# Altium PCB UmbilicalBoardV3.PcbDoc
Units mm, origin at the board's own origin, x right, y up, seen from the top; angles counter-clockwise.
Board outline 89.1 x 92.94 mm, 4 copper layers (Top Layer, GndPlane, PowerPlane, Bottom Layer), stack 0.107 mm thick; 48 components, 68 nets, 393 pads, 78 vias.
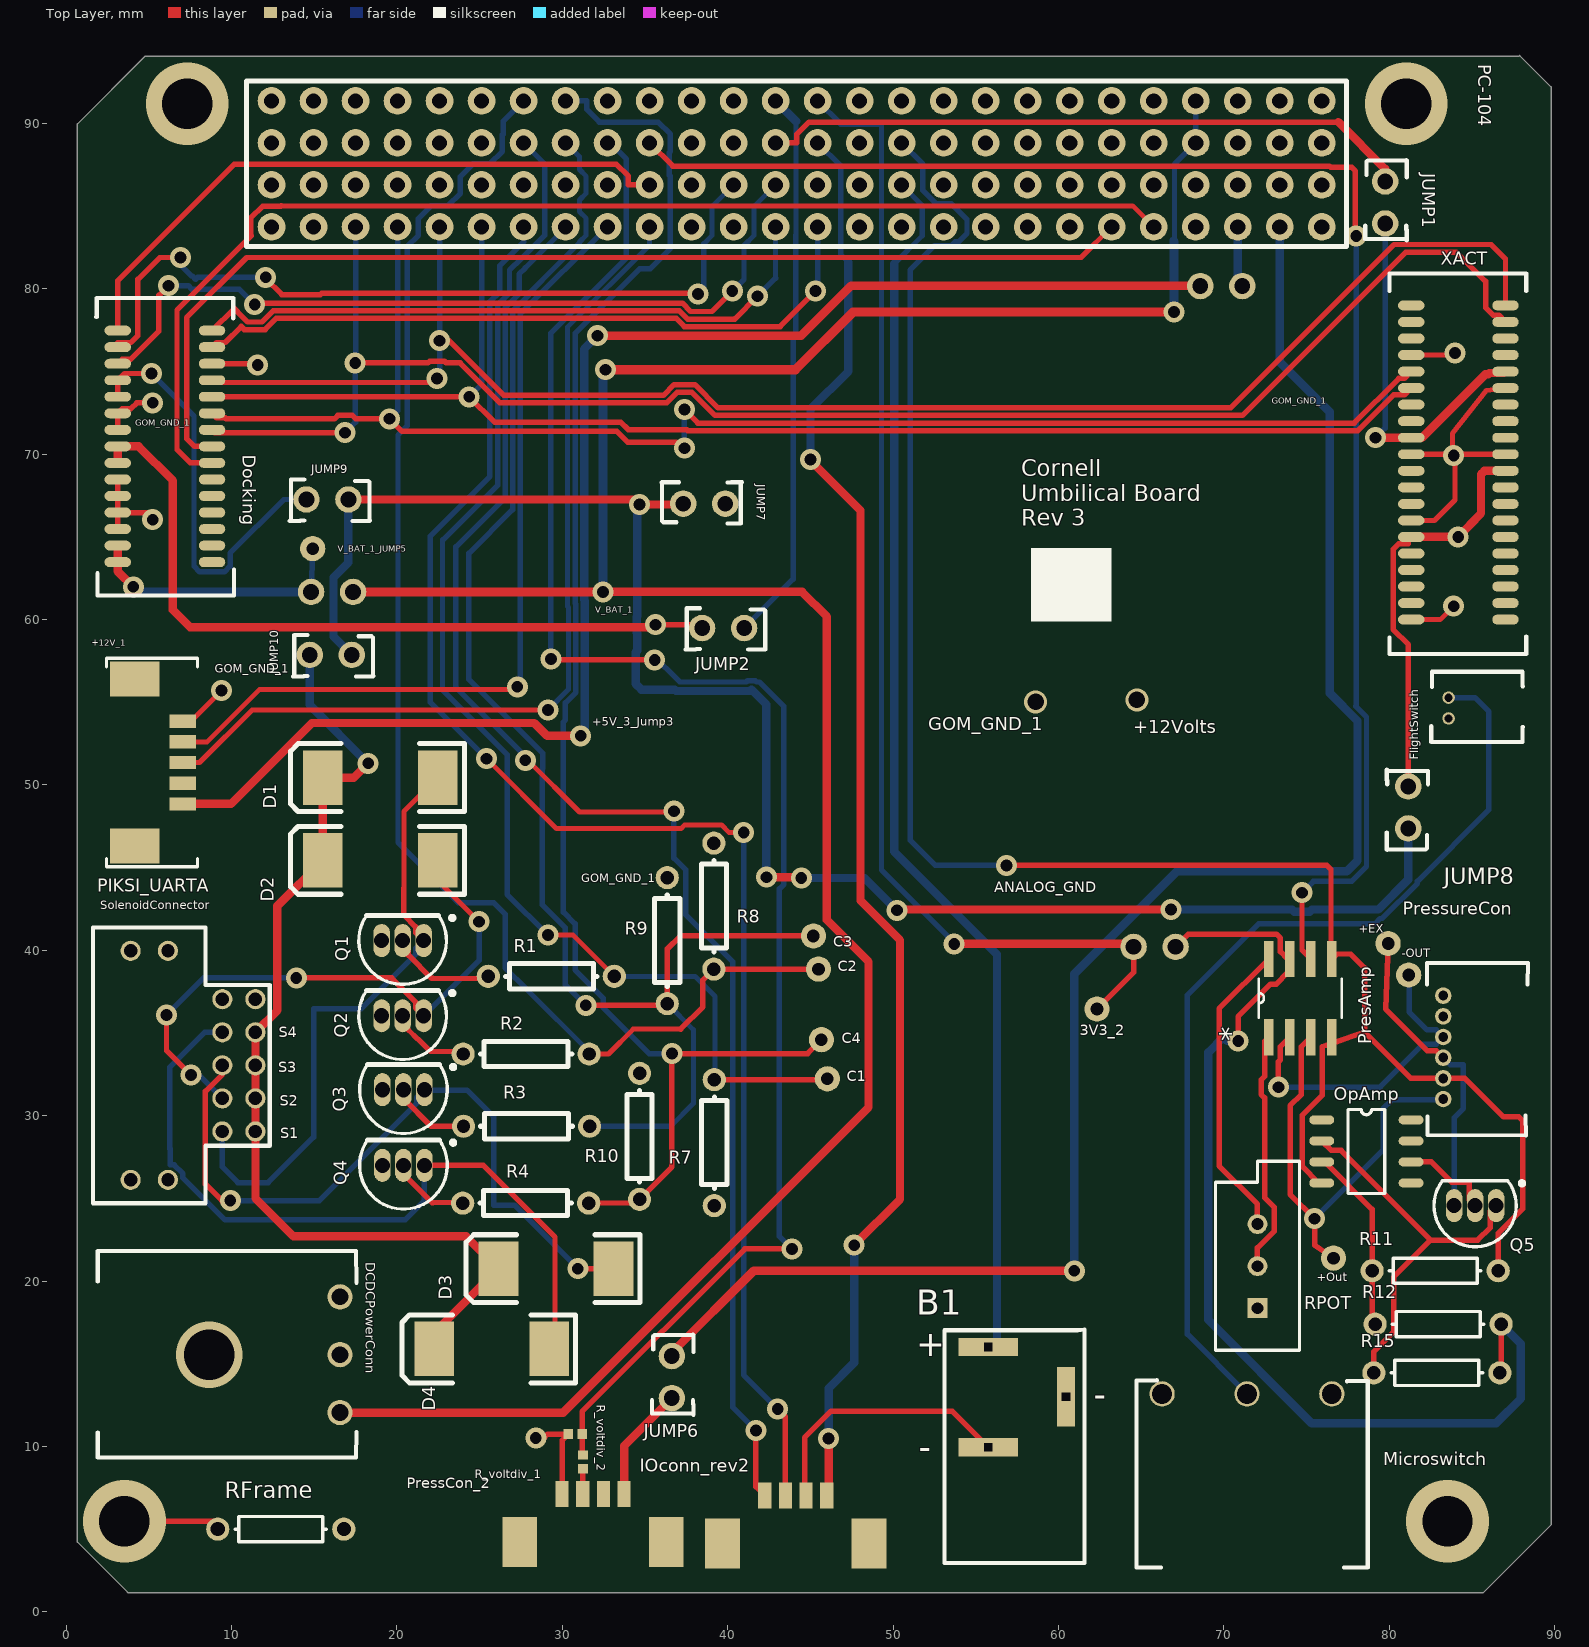
[diagram p0: Top Layer view]
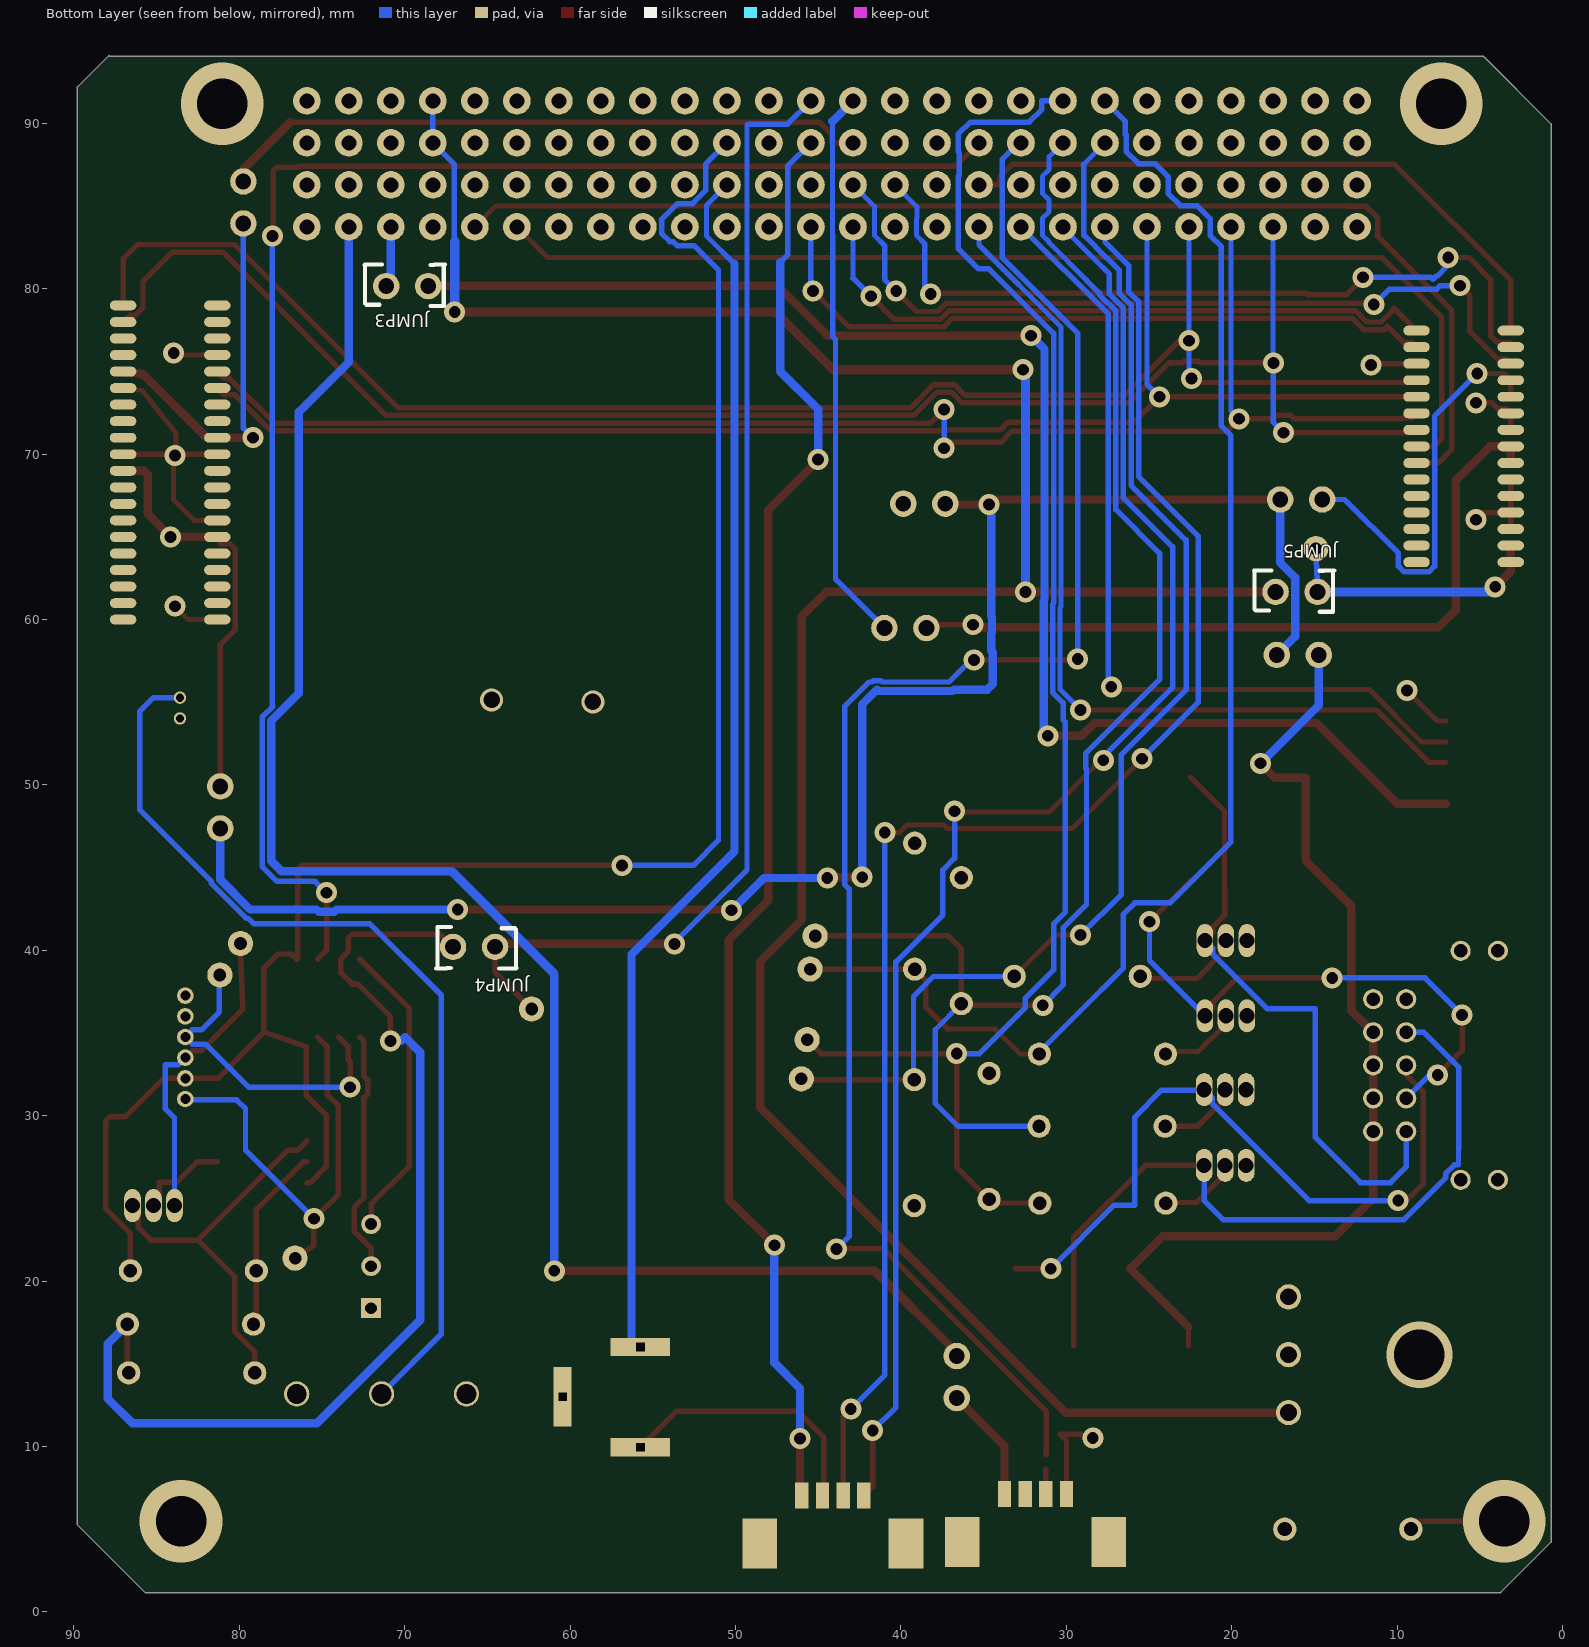
[diagram p1: Bottom Layer view, seen from below]
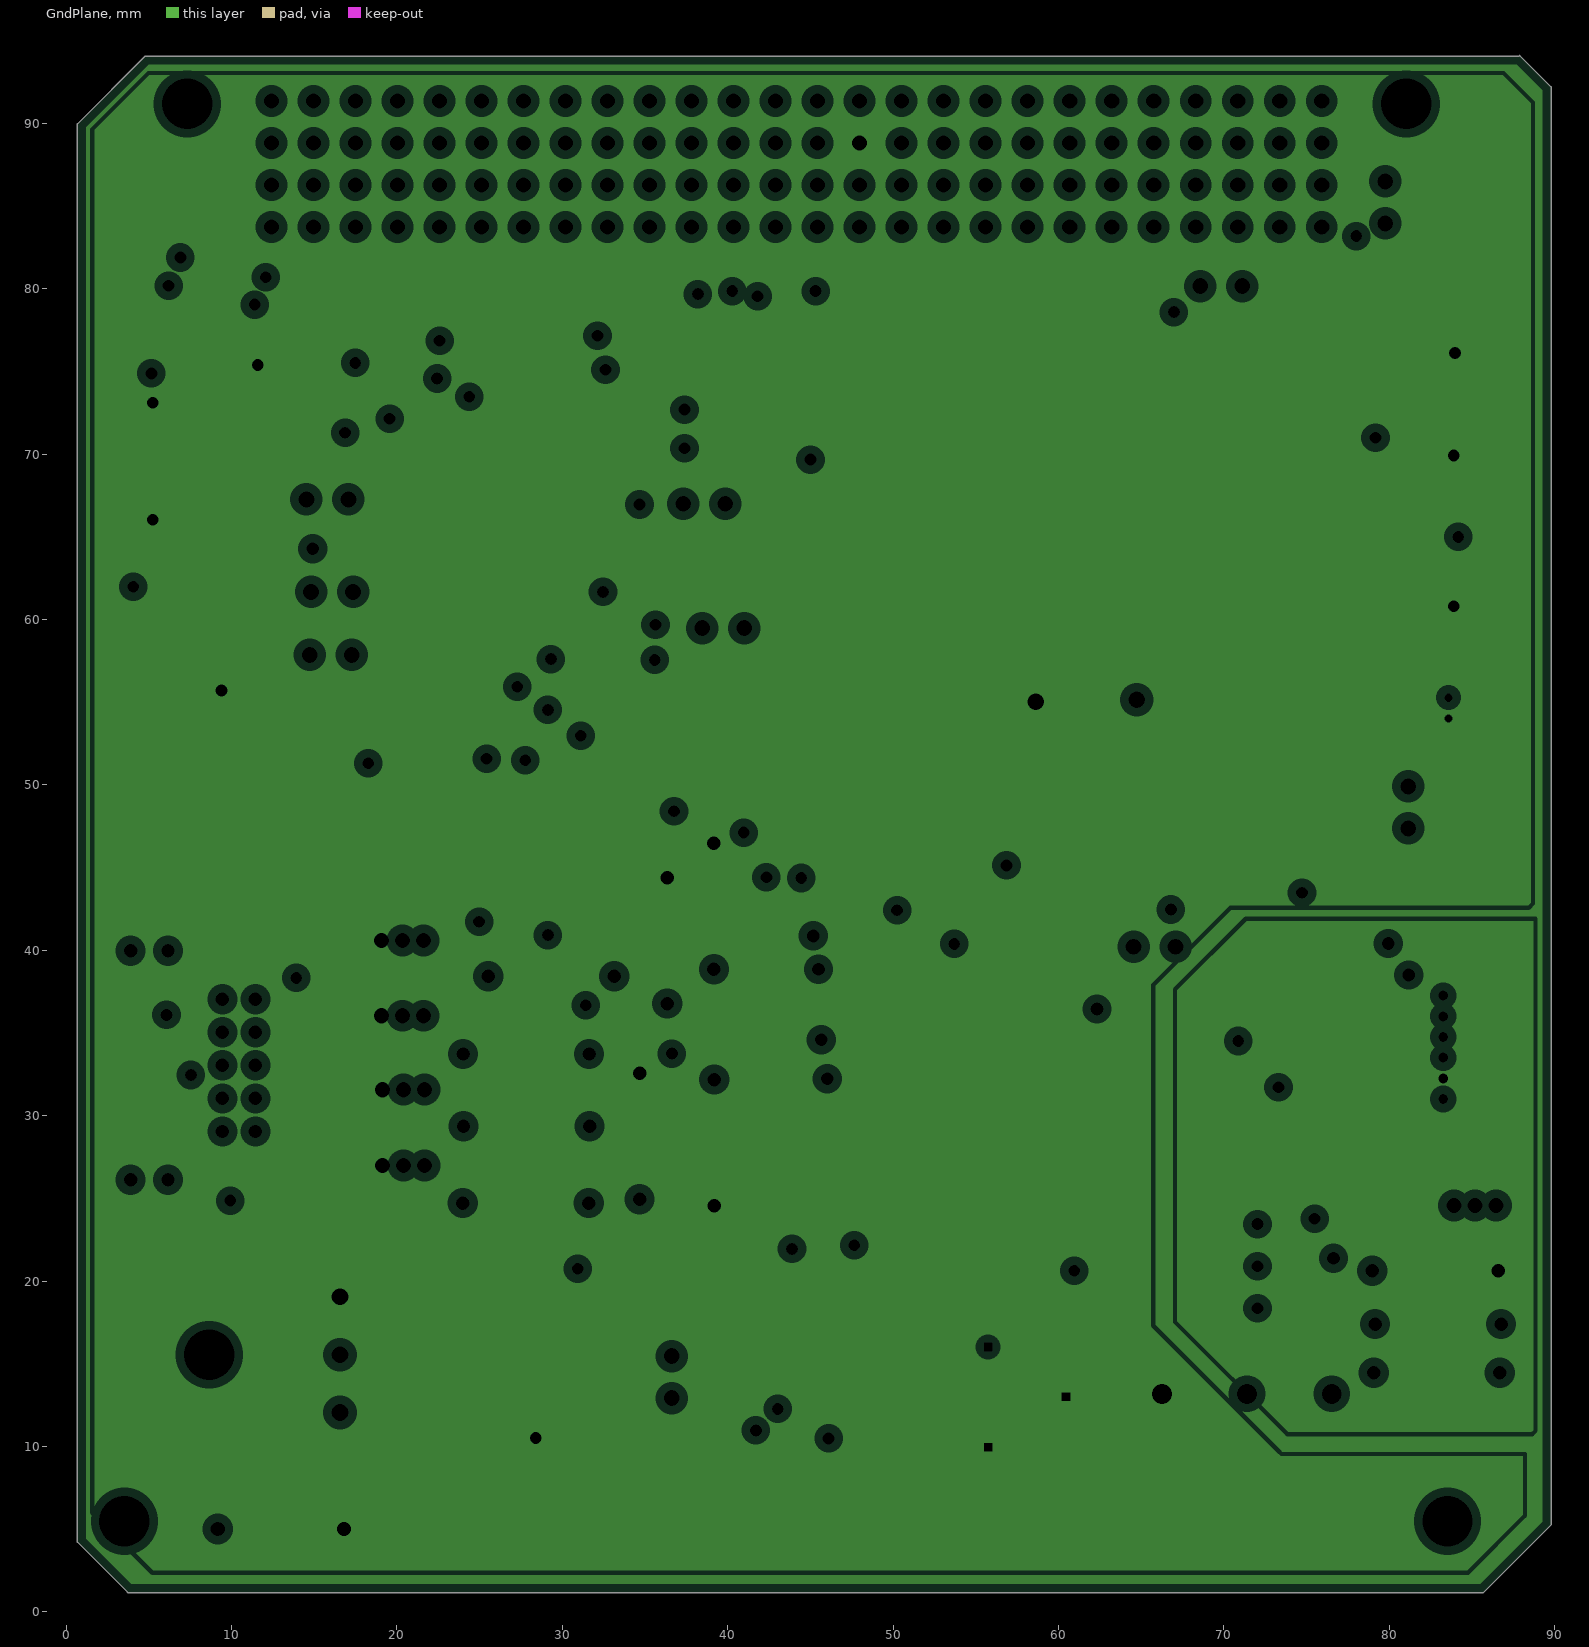
[diagram p2: GndPlane, clearances drawn from the general rule]
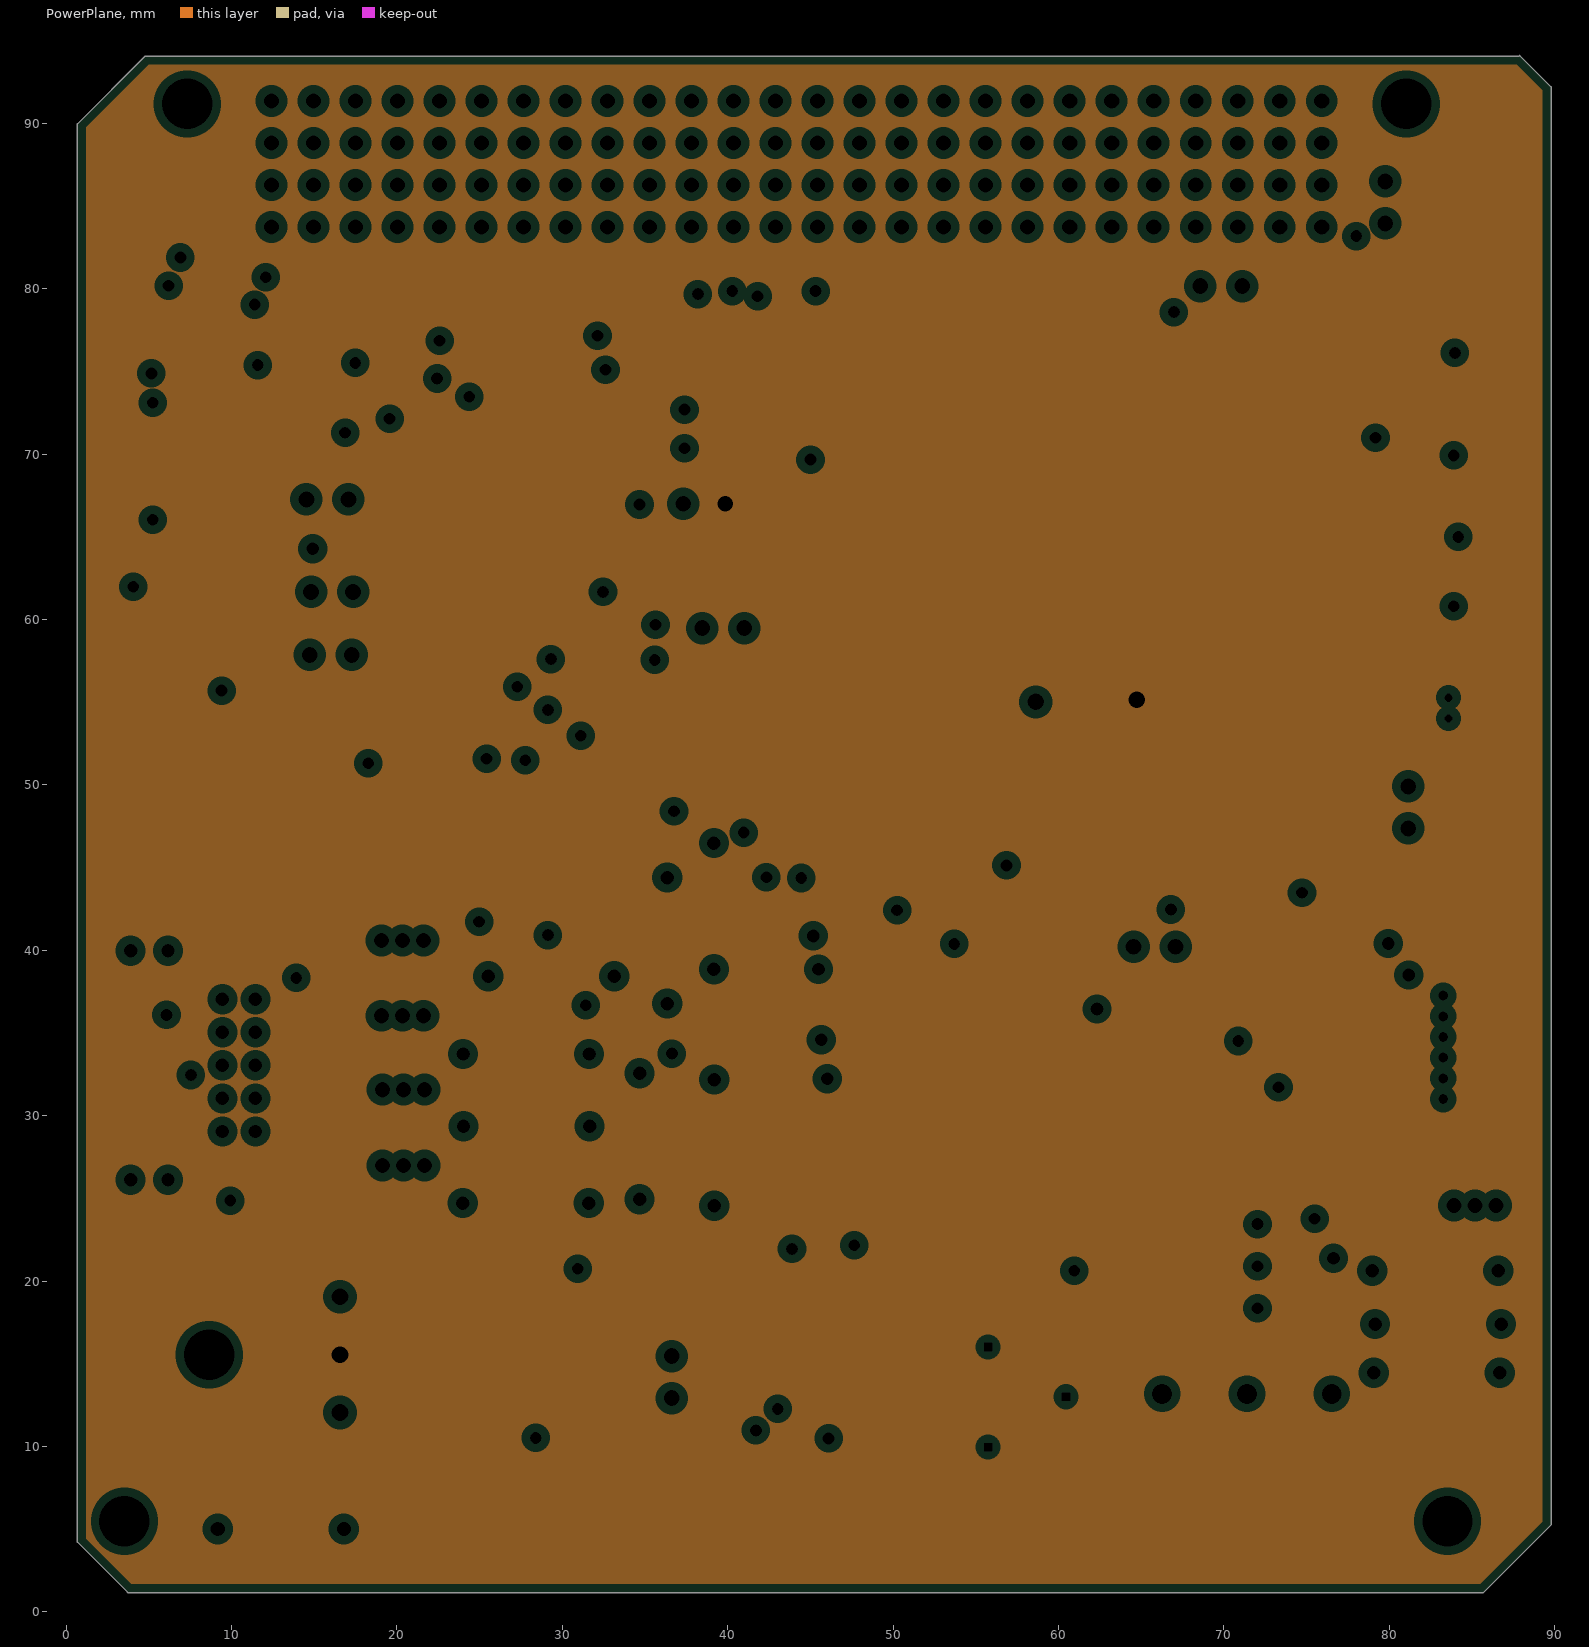
[diagram p3: PowerPlane, clearances drawn from the general rule]

## Layer stack, top to bottom
Top Solder: solder mask 0.0102, Solder Resist, Dk 3.5
Top Layer: signal copper 0.0356
GndPlane: plane copper 0.0178
PowerPlane: plane copper 0.0178, net +12V_1_JUMP7
Bottom Layer: signal copper 0.0356
Bottom Solder: solder mask 0.0102, Solder Resist, Dk 3.5

## Board outline
4.775,94.056 0.686,89.967 0.686,4.216 3.708,1.194 3.734,1.168 84.506,1.168 85.7,1.168 89.789,5.258 89.789,91.821 89.789,92.202 87.884,94.107 87.833,94.056 4.801,94.056

## Design rules (kind name [scope] priority, off if disabled: settings)
Clearance [All] p1: gap=0.254 except(0.127: Track-Track Track-SMDPad Track-THPad SMDPad-SMDPad SMDPad-THPad THPad-THPad)
HoleSize [All] p1: absolutevalues=TRUE maxlimit=3.048 minlimit=0.025 maxpercent=80.000 minpercent=20.000
MinimumSolderMaskSliver [All] p1: minsoldermaskwidth=0.127
PlaneClearance [All] p1: clearance=0.508
PlaneConnect [All] p1: planeconnectstyle=Direct reliefexpansion=0.508 reliefentries=4 reliefconductorwidth=0.254 reliefairgap=0.254
PolygonConnect [All] p1: connectstyle=Direct reliefconductorwidth=0.254 reliefentries=4 polygonreliefangle="90 Angle" airgapwidth=0.254
RoomDefinition PressureSensor [InComponentClass('PressureSensor')] p1: confinementstyle=ConfineIn formatcopy=TRUE lockcomponents=FALSE outline 89.052,42.266 88.603,41.829 69.001,41.829 69.001,13.746 68.631,13.386 88.947,13.386
RoomDefinition SolSwitch [InComponentClass('SolSwitch')] p2: confinementstyle=ConfineIn formatcopy=TRUE lockcomponents=FALSE outline 1.372,23.825 1.372,42.24 1.803,42.672 11.278,42.672 11.278,51.333 13.945,54 14.376,53.569 25.298,53.569 31.852,47.015 32.766,47.93 41.935,47.93 41.935,24.587 30.556,13.208 20.041,13.208 20.041,20.65 17.12,23.571 1.854,23.571
RoutingVias [All] p1: holewidth=0.711 width=1.27 viastyle="Through Hole" minholewidth=0.711 minwidth=1.27 maxholewidth=0.711 maxwidth=1.27
SolderMaskExpansion [All] p1: expansion=0.102
Width [All] p1: maxlimit=0.559 minlimit=0.305 preferedwidth=0.33
26 further rules are at their usual default settings.

## Classes and differential pairs
component class PressureSensor: OpAmp PresAmp PressureCon Q5 R11 R12 R15 RPOT
component class PIKSI_UARTA: PIKSI_UARTA
component class XACT: XACT
component class U_IOconnector: IOconn_rev2
component class Docking: Docking
component class Switch: FlightSwitch Microswitch
component class Umbilical104: PC-104
component class SolSwitch: D1 D2 D3 D4 Q1 Q2 Q3 Q4 R1 R2 R3 R4 R7 R8 R9 R10
component class U_Jumpers_rev2: JUMP1 JUMP2 JUMP3 JUMP4 JUMP5 JUMP6 JUMP7 JUMP8 JUMP9 JUMP10
component class U_PressureConnector_2: PressCon_2 R_Voltdiv_1 R_Voltdiv_2
component class "Barrel Jack": B1
component class DCDCPowerConn: DCDCPowerConn
component class U_GroundtoFrame: RFrame

## Components (designator, comment, footprint, x,y, rotation, side; value= is the part's Value field where it differs from the comment)
B1 "Barrel_Jack" BARREL_JACK 55.753,9.957 r0 top
D1 "Diode" SMC 18.999,50.444 r180 top
D2 "Diode" SMC 18.999,45.441 r180 top
D3 "Diode" SMC 29.616,20.752 r180 top
D4 "Diode" SMC 25.73,15.9 r180 top
DCDCPowerConn "DCDCPowerConn" DCDCPOWERCONN 16.561,19.05 r270 top
Docking "Docking_Molex_30Pin" DOCKING_MOLEX_30PIN 3.124,77.47 r270 top
FlightSwitch "RemoverBeforeFlightSwitch" "REMOVERBEFOREFLIGHT SWITCH" 83.591,52.07 r90 top
IOconn_rev2 "IOconn_rev2" IOCONN_REV2 42.24,7.036 r0 top
JUMP1 "Jumper(DIP2)" JUMPER(DIP2) 79.756,86.487 r270 top
JUMP2 "Jumper(DIP2)" JUMPER(DIP2) 40.996,59.487 r180 top
JUMP3 "Jumper(DIP2)" JUMPER(DIP2) 71.12,80.162 r180 bottom
JUMP4 "Jumper(DIP2)" JUMPER(DIP2) 64.541,40.208 r0 bottom
JUMP5 "Jumper(DIP2)" JUMPER(DIP2) 17.348,61.671 r180 bottom
JUMP6 "Jumper(DIP2)" JUMPER(DIP2) 36.627,15.469 r270 top
JUMP7 "Jumper(DIP2)" JUMPER(DIP2) 37.313,67.005 r0 top
JUMP8 "Jumper(DIP2)" JUMPER(DIP2) 81.153,47.371 r90 top
JUMP9 "Jumper(DIP2)" JUMPER(DIP2) 17.069,67.259 r180 top
JUMP10 "Jumper(DIP2)" JUMPER(DIP2) 17.272,57.861 r180 top
Microswitch "MicroSwitch" MICROSWITCH_3PIN 71.45,13.233 r180 top locked
OpAmp "UA741" UA741 75.921,29.743 r0 top
PC-104 "PC-104" PC-104FOOTPRINT 12.421,83.744 r0 top locked
PIKSI_UARTA "PIKSI_UART Connector" "MOLEX PICOBLADE 5 PIN" 2.642,57.455 r270 top
PresAmp "AD627ARZ" R_8 74.625,37.109 r90 top
PressCon_2 "PressureConn_2" PRESSCON_2 29.312,6.477 r0 top
PressureCon "PressureConnector" "PRESSURE CONNECTOR" 82.067,33.884 r90 top
Q1 "MOSFET" TO-226-AA 20.345,40.589 r90 top
Q2 "MOSFET" TO-226-AA 20.345,36.043 r90 top
Q3 "MOSFET" TO-226-AA 20.396,31.572 r90 top
Q4 "MOSFET" TO-226-AA 20.396,27 r90 top
Q5 "2N3906" TO-92A 85.192,24.562 r90 top
R1 "100" AXIAL-0.3#1 29.337,38.43 r180 top
R2 "100" AXIAL-0.3#1 27.813,33.731 r180 top
R3 "100" AXIAL-0.3#1 27.838,29.362 r180 top
R4 "100" AXIAL-0.3#1 27.788,24.714 r180 top
R7 "10k" AXIAL-0.3#1 39.192,28.372 r90 top
R8 "10k" AXIAL-0.3#1 39.167,42.672 r270 top
R9 "10k" AXIAL-0.3#1 36.347,40.589 r270 top
R10 "10k" AXIAL-0.3#1 34.671,28.753 r270 top
R11 "1000" AXIAL-0.3#1 82.779,20.625 r0 top
R12 "1000" AXIAL-0.3#1 82.956,17.399 r180 top
R15 "1000" AXIAL-0.3#1 82.88,14.453 r180 top
R_voltdiv_1 "3K" 0402 30.785,10.744 r0 top
R_voltdiv_2 "1090" 0402 31.242,9.068 r90 top
RFrame "Rframe" AXIAL-0.3#2 12.979,5.004 r180 top
RPOT "100K" VR5 72.034,20.904 r90 top
SolenoidConnector "T2M-105-01-X-D-RA-WT" T2M-105-01-X-D-RA-WT 9.449,33.045 r90 top
XACT "XACT_Molex_40Pin" XACT_MOLEX_40PIN 81.331,78.994 r270 top

## Footprints (in the part's own frame and the unit in brackets; to place one, negate y for a bottom-side part, rotate by r counter-clockwise, add the part's x,y. Pads: shape width x height; smd on the part's side, far side on the other; paste and mask are expansions set on the pad)
0402 [mil]
  rect 22x24 smd: 1(-16.5,0) 2(16.5,0)
AXIAL-0.3#1 [mm] "Axial Device, Thru-Hole; 2 Leads; 0.3 in Pin Spacing"
  round 1.4 hole 0.813: 1(-3.81,0) 2(3.81,0)
  silkscreen extent -2.77,-0.76 2.77,0.76
AXIAL-0.3#2 [mm] "Axial Device, Thru-Hole; 2 Leads; 0.3 in Pin Spacing"
  round 1.4 hole 0.85: 1(-3.81,0) 2(3.81,0)
  silkscreen extent -2.77,-0.76 2.77,0.76
BARREL_JACK [mm] "KLDX-0202-B"
  rect 3.6x1.1 hole 0.5 square: 0(0,0) 2(0,6.05)
  rect 1.1x3.6 hole 0.5 square: 1(4.7,3.05)
  silkscreen extent -2.65,-7 5.82,7.12
DCDCPOWERCONN [mil] "172310-1103"
  round 60 hole 40.16: 1(0,0) 2(137.8,0) 3(275.59,0)
  silkscreen extent -109,-577 383,39, body extent -109,-577 383,38, height 239
DOCKING_MOLEX_30PIN [mm] "501571-3007"
  oval 0.6x1.6 smd: A1(0,0) A2(1,0) A3(2,0) A4(3,0) A5(4,0) A6(5,0) A7(6,0) A8(7,0) A9(8,0) A10(9,0) A11(10,0) A12(11,0) A13(12,0) A14(13,0) A15(14,0) A16(0,5.7) A17(1,5.7) A18(2,5.7) A19(3,5.7) A20(4,5.7) A21(5,5.7) A22(6,5.7) A23(7,5.7) A24(8,5.7) A25(9,5.7) A26(10,5.7) A27(11,5.7) A28(12,5.7) A29(13,5.7) A30(14,5.7)
  oval 0.6x1.6 smd far side: B1(0,0) B2(1,0) B3(2,0) B4(3,0) B5(4,0) B6(5,0) B7(6,0) B8(7,0) B9(8,0) B10(9,0) B11(10,0) B12(11,0) B13(12,0) B14(13,0) B15(14,0) B16(0,5.7) B17(1,5.7) B18(2,5.7) B19(3,5.7) B20(4,5.7) B21(5,5.7) B22(6,5.7) B23(7,5.7) B24(8,5.7) B25(9,5.7) B26(10,5.7) B27(11,5.7) B28(12,5.7) B29(13,5.7) B30(14,5.7)
  silkscreen extent -1.97,-1.3 16.02,7.02, body extent -1.97,-1.27 16.02,6.98, height 2.95
IOCONN_REV2 [mm] "Molex 4 Pin Picoblade. Part # 53261-0471"
  rect 0.8x1.6 all layers, no hole: 1(0,0) 2(1.25,0) 3(2.5,0) 4(3.75,0)
  rect 2.1x3 all layers, no hole: 5(-2.55,-2.9) 6(6.3,-2.9)
  body extent -3.22,-4.47 6.93,0.73, height 1.7
JUMPER(DIP2) [mm] "S1012E-02-ND (Pin), 3M9580-ND (Jumper)"
  round 1.6 hole 0.95: 1(0,0) 2(2.54,0)
  silkscreen extent -1.3,-1.2 3.55,1.3
MICROSWITCH_3PIN [mm] "Omron Electronics Inc-EMC Div D2FS-FL-N-A1"
  round 1.524 hole 1.2: 1(-5.08,0.05) 2(0.05,0.05) 3(5.18,0.05)
  silkscreen extent -7.25,-0.77 6.73,10.55, body extent -7.25,-0.75 6.73,10.55
"MOLEX PICOBLADE 5 PIN" [mm] "Molex Picoblade Header, SMT, Right Angle  53261-0571"
  rect 0.8x1.6 smd: 0(3.6,4.4) 1(4.85,4.4) 2(6.1,4.4) 3(7.35,4.4) 4(8.6,4.4)
  rect 2.1x3 smd: 5(1.05,1.5) 6(11.15,1.5)
  silkscreen extent -0.2,-0.2 12.4,5.3, body extent 0.4,0 11.8,5.2, height 3.4
PC-104FOOTPRINT [mil]
  round 65.98 hole 36 mask+2.99: H1_1(0,0) H1_2(0,100) H1_3(100,0) H1_4(100,100) H1_5(200,0) H1_6(200,100) H1_7(300,0) H1_8(300,100) H1_9(400,0) H1_10(400,100) H1_11(500,0) H1_12(500,100) H1_13(600,0) H1_14(600,100) H1_15(700,0) H1_16(700,100) H1_17(800,0) H1_18(800,100) H1_19(900,0) H1_20(900,100) H1_21(1000,0) H1_22(1000,100) H1_23(1100,0) H1_24(1100,100) H1_25(1200,0) H1_26(1200,100) H1_27(1300,0) H1_28(1300,100) H1_29(1400,0) H1_30(1400,100) H1_31(1500,0) H1_32(1500,100) H1_33(1600,0) H1_34(1600,100) H1_35(1700,0) H1_36(1700,100) H1_37(1800,0) H1_38(1800,100) H1_39(1900,0) H1_40(1900,100) H1_41(2000,0) H1_42(2000,100) H1_43(2100,0) H1_44(2100,100) H1_45(2200,0) H1_46(2200,100) H1_47(2300,0) H1_48(2300,100) H1_49(2400,0) H1_50(2400,100) H1_51(2500,0) H1_52(2500,100) H2_1(0,200) H2_2(0,300) H2_3(100,200) H2_4(100,300) H2_5(200,200) H2_6(200,300) H2_7(300,200) H2_8(300,300) H2_9(400,200) H2_10(400,300) H2_11(500,200) H2_12(500,300) H2_13(600,200) H2_14(600,300) H2_15(700,200) H2_16(700,300) H2_17(800,200) H2_18(800,300) H2_19(900,200) H2_20(900,300) H2_21(1000,200) H2_22(1000,300) H2_23(1100,200) H2_24(1100,300) H2_25(1200,200) H2_26(1200,300) H2_27(1300,200) H2_28(1300,300) H2_29(1400,200) H2_30(1400,300) H2_31(1500,200) H2_32(1500,300) H2_33(1600,200) H2_34(1600,300) H2_35(1700,200) H2_36(1700,300) H2_37(1800,200) H2_38(1800,300) H2_39(1900,200) H2_40(1900,300) H2_41(2000,200) H2_42(2000,300) H2_43(2100,200) H2_44(2100,300) H2_45(2200,200) H2_46(2200,300) H2_47(2300,200) H2_48(2300,300) H2_49(2400,200) H2_50(2400,300) H2_51(2500,200) H2_52(2500,300)
  silkscreen extent -59,-47 2559,347
PRESSCON_2 [mm] "Molex Picoblade 4 pin (for the second pressure conn) Part # 53261-0471"
  rect 0.8x1.6 all layers, no hole: 1(0.675,0.65) 2(1.925,0.65) 3(3.175,0.65) 4(4.425,0.65)
  rect 2.1x3 all layers, no hole: 5(-1.875,-2.25) 6(6.975,-2.25)
  body extent -2.55,-3.82 7.6,1.38, height 1.7
"PRESSURE CONNECTOR" [mm] "53048-0610"
  round 1 hole 0.6 mask+0.076: 1(-2.875,-1.2) 2(-1.625,-1.2) 3(-0.375,-1.2) 4(0.875,-1.2) 5(2.125,-1.2) 6(3.375,-1.2)
  silkscreen extent -5.07,-6.32 5.35,-0.23, body extent -4.45,-6.08 4.8,-0.58, height 1.75
R_8 [mil]
  rect 86x22 smd: 1(-93,75) 2(-93,25) 3(-93,-25) 4(-93,-75) 5(93,-75) 6(93,-25) 7(93,25) 8(93,75)
  silkscreen extent -46,-98 46,98
"REMOVERBEFOREFLIGHT SWITCH" [mm] "Molex Picoblade Part Number: 53048-0210"
  round 0.75 hole 0.5: 1(1.95,0) 2(3.205,0)
  silkscreen extent 0.53,-4.5 4.78,1.05, body extent 0.53,-4.47 4.78,1.03, height 4.05
SMC [mm] "DO-214-AB/SMC; 2 C-Bend Leads; Body 7.9 x 5.9 mm, inc. leads (LxW)"
  rect 2.4x3.3 smd: 1(-3.475,0) 2(3.475,0)
  silkscreen extent -5.08,-2.05 5.42,2.06
T2M-105-01-X-D-RA-WT [mm]
  round 1.22 hole 0.813 mask+0.075: 1(-4,-2) 2(-4,0) 3(-2,-2) 4(-2,0) 5(0,-2) 6(0,0) 7(2,-2) 8(2,0) 9(4,-2) 10(4,0) W1(-6.925,5.55) W2(6.925,5.55) W3(-6.925,3.29) W4(6.925,3.29)
  silkscreen extent -8.33,-2.86 8.33,7.82, body extent -7.28,-2.17 8.4,7.39, height 7.45
TO-92A [mm] "TO, Flat Index; 3 In-Line, Axial Leads; Body Dia. 4.5mm; Leads 0.51 x 0.48 mm (max)"
  oval 2x1 hole 0.914: 1(0,-1.27) 2(0,0) 3(0,1.27)
  silkscreen extent -2.48,-2.96 1.5,2.48, body extent -2.48,-2.5 1.5,2.5, height 6.86
TO-226-AA [mm] "TO, Flat Index; 3 In-Line, Axial Leads; Body Dia. 4.8mm; Leads 0.55 x 0.51 mm (max)"
  oval 2x1 hole 0.914: 1(0,-1.27) 2(0,0) 3(0,1.27)
  silkscreen extent -2.65,-3.13 1.52,2.65, body extent -2.65,-2.66 1.52,2.66, height 5.33
UA741 [mm]
  oval 1.5x0.55 smd: 1(0,0) 2(0,-1.27) 3(0,-2.54) 4(0,-3.81) 5(5.4,-3.81) 6(5.4,-2.54) 7(5.4,-1.27) 8(5.4,0)
  silkscreen extent 1.58,-4.44 3.82,0.64
VR5 [mm] "Thru-Hole; 3 Leads"
  rect 1.2x1.2 hole 0.711: 1(-2.54,0)
  round 1.2 hole 0.711: 2(0,0) 3(2.54,0)
  silkscreen extent -5.08,-2.54 6.35,2.54
XACT_MOLEX_40PIN [mm] "501571-4007"
  oval 0.6x1.6 smd: A1(0,0) A2(1,0) A3(2,0) A4(3,0) A5(4,0) A6(5,0) A7(6,0) A8(7,0) A9(8,0) A10(9,0) A11(10,0) A12(11,0) A13(12,0) A14(13,0) A15(14,0) A16(15,0) A17(16,0) A18(17,0) A19(18,0) A20(19,0) A21(0,5.7) A22(1,5.7) A23(2,5.7) A24(3,5.7) A25(4,5.7) A26(5,5.7) A27(6,5.7) A28(7,5.7) A29(8,5.7) A30(9,5.7) A31(10,5.7) A32(11,5.7) A33(12,5.7) A34(13,5.7) A35(14,5.7) A36(15,5.7) A37(16,5.7) A38(17,5.7) A39(18,5.7) A40(19,5.7)
  oval 0.6x1.6 smd far side: B1(0,0) B2(1,0) B3(2,0) B4(3,0) B5(4,0) B6(5,0) B7(6,0) B8(7,0) B9(8,0) B10(9,0) B11(10,0) B12(11,0) B13(12,0) B14(13,0) B15(14,0) B16(15,0) B17(16,0) B18(17,0) B19(18,0) B20(19,0) B21(0,5.7) B22(1,5.7) B23(2,5.7) B24(3,5.7) B25(4,5.7) B26(5,5.7) B27(6,5.7) B28(7,5.7) B29(8,5.7) B30(9,5.7) B31(10,5.7) B32(11,5.7) B33(12,5.7) B34(13,5.7) B35(14,5.7) B36(15,5.7) B37(16,5.7) B38(17,5.7) B39(18,5.7) B40(19,5.7)
  silkscreen extent -1.92,-1.32 21.08,6.95, body extent -1.85,-1.35 21.15,6.9, height 2.95

## Part data
D1 D2 D3 D4: "Default Diode"
Docking: "24 Pin Connector"
FlightSwitch: "53048-0210 Molex Picoblade"
IOconn_rev2: "Part Number: 53261-0471"
Microswitch: "Omron Electronics Inc-EMC Div D2FS-FL-N-A1"
PC-104: "ESQ-126-14-G-D (2 total needed)"
PIKSI_UARTA: "Molex Picoblade 5 Pin"
PresAmp: "Imported"
PressureCon: "Molex 53261-0671"
Q1 Q2 Q3 Q4: library part MOSFET-N, "N-Channel MOSFET"
Q5: "PNP General Purpose Amplifier"
R1 R2 R3 R4 R7 R8 R9 R10: library part PMR100HZPFU6L00, "Imported"
R11 R12 R15: library part Res1, "Resistor- 696-1552-ND"
R_voltdiv_1 R_voltdiv_2: library part CRCW040210R0FKED, "Imported"
RFrame: library part Res1, "Resistor -  CF14JT1M00CT-ND"
RPOT: library part RPot, "Potentiometer"
SolenoidConnector: "2MM PITCH SHROUDED RIGHT ANGLE TERMINAL STRIP."
XACT: "31 Pin Airborn Nano Connector"

## Free pads (board coordinates)
  round 1.524 hole 0.762: 2(14.91,64.287) 3(62.332,36.449) 4(76.632,21.387) 5(79.934,40.411) 6(81.178,38.506) 10(46.025,32.233) 11(45.491,38.862) 12(45.669,34.595) 13(45.187,40.869)

## Via types
v1: diameter 1.27, hole 0.711, Top Layer to Bottom Layer, 71 vias
v2: diameter 5, hole 3.048, Top Layer to Bottom Layer, 4 vias
v3: diameter 1.4, hole 1, Top Layer to Bottom Layer, 2 vias
v4: diameter 4, hole 3.048, Top Layer to Bottom Layer, 1 vias

## Nets (pads, with @x,y where several pads share a name; then routed paths per layer and width w, separated by ;. In a path a pad name is that pad's centre, name@x,y a point inside that pad or via, vN(x,y) a via of type N, cw(c..) or ccw(c..) an arc to the next point about the centre after c; other vN are vias at no path point)
3V3_1: IOconn_rev2.4 PC-104.H2_27 | length 87.7
  Top Layer w0.33: IOconn_rev2.4@45.898,7.128 IOconn_rev2.4
  Top Layer w0.508: v1@44.958,69.672 48.031,66.599 48.031,43.002 50.419,40.615 50.419,24.943 v1(47.65,22.174) ; IOconn_rev2.4@45.898,7.128 46.101,7.331 v1(46.101,10.49)
  Bottom Layer w0.33: PC-104.H2_27 46.851,87.414 46.851,82.055 47.295,81.611
  Bottom Layer w0.508: v1(45.009,69.672) 45.009,72.72 47.295,75.006 47.295,81.611 ; v1(46.101,10.49) 46.101,13.513 47.65,15.062 v1(47.65,22.174)
3V3_2: JUMP4.1 pad.3 PC-104.H2_28 | length 71.2
  Top Layer w0.33: pad.3 64.541,38.659 JUMP4.1
  Top Layer w0.508: v1(53.696,40.386) JUMP4.1@64.541,40.386
  Bottom Layer w0.305: 49.301,89.891 49.301,44.856 v1@53.657,40.5
  Bottom Layer w0.33: PC-104.H2_28 46.851,89.954 49.238,89.954 49.301,89.891
3V3_2_JUMP4: JUMP4.2 PresAmp.7 R12.1 R15.1 | length 63.1
  Top Layer w0.33: JUMP4.2 67.856,40.983 73.173,40.983 73.419,40.737 73.419,39.916 73.863,39.472 73.863,38.65 73.173,37.96 72.834,37.96 70.866,35.992 v1(70.866,34.519) ; R15.1 86.766,14.529 R12.1
  Bottom Layer w0.33: 70.209,34.519 v1(70.866,34.519)
  Bottom Layer w0.508: 70.209,34.519 69.98,34.747 69.063,33.829 69.063,17.655 75.313,11.405 86.462,11.405 87.96,12.903 87.96,16.205 R12.1
+5V_1: JUMP1.1 PC-104.H2_25 | length 39.6
  Top Layer w0.33: PC-104.H2_25 44.184,88.824 44.184,89.345 44.92,90.081 76.924,90.081 ; JUMP1.1 JUMP1.1@79.756,87.249
  Top Layer w0.508: 76.924,90.081 JUMP1.1@79.756,87.249
+5V_1_JUMP1: JUMP1.2 XACT.A9 XACT.A25 | length 22.7
  Top Layer w0.508: v1(79.172,70.994) 81.973,70.994 85.808,74.828 85.979,74.828 86.055,74.904 86.941,74.904 XACT.A25
  Bottom Layer w0.33: v1(79.172,70.994) 79.756,71.578 JUMP1.2
+5V_2: JUMP2.1 PC-104.H2_26 | length 33.7
  Bottom Layer w0.305: 44.138,83.221 44.145,83.228 44.145,90.119
  Bottom Layer w0.33: JUMP2.1 43.955,62.446 43.955,76.924 44.12,77.089 44.12,83.239
  Bottom Layer w0.508: PC-104.H2_26 44.145,90.119
+5V_2_JUMP2: Docking.A8 Docking.A9 JUMP2.2 | length 45.5
  Top Layer w0.33: v1(35.636,59.69) 38.252,59.69 JUMP2.2
  Top Layer w0.508: Docking.A9 Docking.A8 4.384,70.47 6.452,68.402 6.452,60.579 7.493,59.538 v1@35.636,59.538
+5V_3: JUMP3.1 PC-104.H1_47 | length 3.7
  Bottom Layer w0.33: JUMP3.1@70.841,80.442 JUMP3.1
  Bottom Layer w0.508: JUMP3.1@70.841,80.442 70.841,81.661 PC-104.H1_47
+5V_3_JUMP3: JUMP3.2 PIKSI_UARTA.4 | length 88.8
  Top Layer w0.508: PIKSI_UARTA.4 9.967,48.855 14.859,53.746 28.305,53.746 29.079,52.972 v1(31.115,52.972) ; v1(32.131,77.165) 44.45,77.165 47.473,80.188 JUMP3.2@68.58,80.188
  Bottom Layer w0.508: v1(31.115,52.972) 31.039,53.048 31.369,53.378 31.369,61.147 31.318,61.198 31.318,76.352 v1(32.131,77.165)
+5V_5: JUMP6.1 PC-104.H1_49 | length 104.8
  Top Layer w0.33: JUMP6.1 JUMP6.1@36.627,15.672
  Top Layer w0.508: JUMP6.1@36.627,15.672 41.58,20.625 v1(60.96,20.625)
  Bottom Layer w0.508: v1(60.96,20.625) 60.96,38.583 67.158,44.78 77.445,44.78 78.08,45.415 78.08,53.873 76.403,55.55 76.403,72.554 73.381,75.577 PC-104.H1_49
+5V_5_JUMP6: JUMP6.2 PressCon_2.4 | length 7
  Top Layer w0.508: PressCon_2.4 33.737,10.038 JUMP6.2
+12V_1: JUMP7.1 JUMP8.1 JUMP9.1 JUMP10.1 | length 104
  Top Layer w0.33: JUMP7.1@37.262,66.954 JUMP7.1 ; v1@44.399,44.425 v1(44.45,44.374)
  Top Layer w0.508: JUMP9.1 34.366,67.259 v1(34.671,66.954) JUMP7.1@37.262,66.954 ; v1(42.342,44.425) v1@44.399,44.425 ; v1@50.317,42.469 v1(66.802,42.469)
  Bottom Layer w0.33: v1@34.531,66.815 v1(34.671,66.954)
  Bottom Layer w0.508: JUMP9.1 17.069,63.449 16.167,62.548 16.167,58.966 JUMP10.1 ; v1@34.531,66.815 34.531,60.202 34.493,60.163 34.493,59.217 34.531,59.178 34.531,58.119 34.442,58.03 34.442,56.109 34.785,55.766 36.789,55.766 36.878,55.677 41.351,55.677 41.44,55.766 42.342,54.864 v1(42.342,44.425) ; v1(44.45,44.374) 48.285,44.374 v1(50.241,42.418) ; v1(66.802,42.469) 74.126,42.469 74.253,42.342 75.2,42.342 75.327,42.469 79.346,42.469 81.153,44.276 JUMP8.1
+12V_1_JUMP7: DCDCPowerConn.2 JUMP7.2
  other v3: 64.745,55.143
+12V_1_JUMP8: JUMP8.2 XACT.A15 XACT.A31 | length 25
  Top Layer w0.33: JUMP8.2 81.153,58.488 80.239,59.402 80.239,64.239 80.586,64.586 81.153,64.586 81.153,64.816 XACT.A15
  Top Layer w0.508: XACT.A15 v1(84.171,64.994) 85.547,66.421 85.547,68.783 85.758,68.994 XACT.A31
+12V_1_JUMP9: Docking.A4 Docking.A5 JUMP9.2 | length 25.3
  Top Layer w0.33: Docking.A5 Docking.A4 3.532,74.878 v1(5.156,74.879) v1(5.156,74.879)
  Bottom Layer w0.33: v1@5.347,75.07 5.347,74.689 7.732,72.303 7.732,63.225 8.079,62.878 9.569,62.878 9.916,63.225 9.916,64.012 13.164,67.259 JUMP9.2
+12V_1_JUMP10: D1.2 D2.2 D3.2 D4.2 JUMP10.2 SolenoidConnector.1 SolenoidConnector.3 SolenoidConnector.5 SolenoidConnector.7 | length 60.8
  Top Layer w0.33: D4.2@22.611,16.104 D4.2@22.611,17.221 ; D3.2@26.129,20.764 D3.2
  Top Layer w0.508: v1(18.263,51.308) 17.399,50.444 D1.2 D2.2 12.776,42.692 12.776,36.373 SolenoidConnector.7 11.449,25.005 13.746,22.708 20.142,22.708 24.186,22.708 D3.2@26.129,20.764 ; D4.2@22.611,17.221 D3.2
  Bottom Layer w0.508: JUMP10.2 14.732,54.839 v1(18.263,51.308)
ANALOGGND: OpAmp.4 PC-104.H2_31 PresAmp.4 PresAmp.5 PressureCon.2 R11.2 | length 118
  Top Layer w0.33: v1(56.858,45.136) 76.238,45.136 76.479,44.894 76.479,39.522 PresAmp.5 76.835,39.776 77.673,39.776 78.511,38.938 78.511,35.052 ; OpAmp.4 75.734,25.933 74.752,26.916 74.752,30.032 75.959,31.239 75.959,34.176 76.645,34.411 78.511,35.052 ; R11.2 86.589,22.889 88.086,24.387 88.086,29.682 87.841,29.928 86.912,29.928 84.581,32.259 PressureCon.2 81.305,32.259 78.511,35.052
  Bottom Layer w0.33: PC-104.H2_31 51.804,87.541 51.804,85.943 52.593,85.154 53.529,85.154 ; 53.518,85.154 54.471,84.201 54.471,83.35 53.975,82.855 53.77,82.855 53.529,82.614 52.515,82.614 51.029,81.128 51.029,46.66 52.553,45.136 v1(56.858,45.136)
BAT_CHARGE: B1.2 PC-104.H1_32 | length 74.3
  Bottom Layer w0.305: 50.063,81.501 51.765,83.203 51.765,85.039 PC-104.H1_32
  Bottom Layer w0.33: B1.2 B1.2@56.286,16.54
  Bottom Layer w0.508: 50.063,81.501 50.063,45.974 56.286,39.751 B1.2@56.286,16.54
C0: pad.10 PC-104.H2_13 R1.1 R7.2 | length 77.2
  Top Layer w0.305: v1(29.134,40.919) 30.658,40.919 R1.1
  Top Layer w0.33: R7.2 45.974,32.182 pad.10
  Bottom Layer w0.305: PC-104.H2_13 28.982,87.503 28.956,87.477 ; R1.1 38.024,38.43 39.243,37.211 R7.2@39.243,32.182
  Bottom Layer w0.33: 28.956,87.477 28.944,87.465 28.944,83.249 27.538,81.844 27.52,81.844 26.81,81.133 26.81,79.753 26.086,79.029 26.086,68.111 22.796,64.821 22.758,64.821 22.758,55.745 26.67,51.834 26.67,43.383 v1(29.134,40.919)
C1: pad.11 PC-104.H2_14 R2.1 R8.2 | length 85.1
  Top Layer w0.305: R2.1@31.521,33.833 R2.1 32.791,33.731 34.29,35.23 37.16,35.23
  Top Layer w0.33: 37.16,35.23 38.506,36.576 38.506,38.202 R8.2 pad.11
  Bottom Layer w0.305: 27.853,37.632 31.623,33.863 31.587,33.852 R2.1@31.521,33.833
  Bottom Layer w0.33: 25.832,42.875 23.724,42.875 20.066,46.533 20.066,71.153 20.625,71.712 20.625,82.55 21.298,83.223 21.298,84.239 22.086,85.027 23.101,85.027 23.838,85.763 23.838,86.779 24.626,87.567 25.641,87.567 26.378,88.303 26.378,89.319 26.415,89.356 ; 25.857,42.875 26.543,42.189 26.543,38.943 27.853,37.632 ; 26.442,89.329 26.442,90.145 PC-104.H2_14
C2: pad.13 PC-104.H2_15 R3.1 R9.2 | length 89.7
  Top Layer w0.305: v1(31.42,36.678) R9.2@36.246,36.678
  Top Layer w0.33: R9.2 36.347,40.081 37.135,40.869 pad.13
  Bottom Layer w0.305: 28.803,80.543 31.039,82.779 31.039,82.822 31.445,83.228 31.445,84.259 31.039,84.665 31.039,85.362 31.445,85.768 31.445,86.799 31.039,87.205 31.039,87.986 PC-104.H2_15 ; R3.1 36.551,29.362 37.922,30.734 37.922,35.204 R9.2
  Bottom Layer w0.33: 28.803,80.543 27.978,79.718 27.978,79.628 27,78.65 27,66.65 24.359,64.008 24.359,56.38 28.816,51.922 28.816,51.011 28.778,50.973 28.778,42.766 30.188,41.356 30.188,37.91 v1(31.42,36.678)
C3: pad.12 PC-104.H2_16 R4.1 R10.2 | length 91.9
  Top Layer w0.305: R4.1 34.442,24.714 R10.2
  Top Layer w0.33: R10.2 36.627,26.899 v1(36.627,33.757) 44.831,33.757 pad.12
  Bottom Layer w0.33: PC-104.H2_16 31.484,91.364 31.484,90.843 32.246,90.081 35.801,90.081 36.538,89.345 36.538,88.303 36.474,88.24 36.474,86.868 36.538,86.805 36.538,82.436 35.306,81.204 34.679,81.204 30.772,77.297 30.772,60.972 30.823,60.921 30.823,55.594 30.188,54.959 30.188,53.932 30.061,53.805 30.061,42.309 30.772,41.598 30.772,38.816 32.474,37.114 32.474,36.538 35.255,33.757 v1(36.627,33.757)
GOM_GND_1: B1.0 B1.1 DCDCPowerConn.1 Docking.A6 Docking.A7 Docking.A10 Docking.A11 Docking.A12 Docking.A13 Docking.A18 FlightSwitch.1 IOconn_rev2.3 Microswitch.3 PC-104.H2_29 PIKSI_UARTA.0 PressCon_2.1 Q1.3 Q2.3 Q3.3 Q4.3 R7.1 R8.1 R9.1 R10.1 R_voltdiv_1.1 RFrame.1 XACT.A4 XACT.A10 XACT.A14 XACT.A20 XACT.A26 XACT.A30 | length 60.1
  Top Layer w0.305: PIKSI_UARTA.0 7.551,53.855 v1(9.398,55.702) ; XACT.A20 83.083,59.994 v1(83.896,60.808) ; XACT.A14 82.733,65.994 83.972,67.234 v1@83.972,69.994 ; XACT.A10 v1@83.828,69.994 ; XACT.A4 83.843,75.994 v1(83.972,76.124) ; XACT.A30 v1@83.972,69.994 ; XACT.A26 85.89,73.861 83.828,71.255 v1@83.828,69.994 ; v1@83.828,69.994 v1@83.972,69.994
  Top Layer w0.33: Docking.A13 Docking.A12 ; Docking.A10 Docking.A12 ; Docking.A7 Docking.A6 3.405,72.751 3.922,72.751 4.272,73.101 v1(5.232,73.101) v1@5.232,72.949 ; v1(5.232,66.04) 5.08,66.04 4.877,66.243 4.978,66.345 4.853,66.47 Docking.A12 ; Docking.A18 11.5,75.47 v1(11.582,75.387) ; v1(28.397,10.516) 28.892,10.516 29.121,10.744 R_voltdiv_1.1 29.987,10.365 PressCon_2.1 ; IOconn_rev2.3@44.653,6.807 44.653,10.541 46.253,12.141 53.569,12.141 B1.0
  other v1: 83.896,69.926
  other v3: 58.623,55.016
GPIO3: Docking.A3 PC-104.H1_26 | length 49.1
  Top Layer w0.33: Docking.A3 3.405,75.751 3.922,75.751 5.613,77.442 5.613,79.604 v1(6.198,80.188) ; v1(11.405,79.045) 11.493,79.134 37.257,79.134 37.765,78.626 39.052,78.626 v1(40.284,79.858)
  Bottom Layer w0.305: 40.988,82.612 41.605,83.228 41.605,84.937 41.58,84.963 PC-104.H1_26
  Bottom Layer w0.33: v1(6.198,80.188) 7.391,80.188 7.595,79.985 10.465,79.985 v1(11.405,79.045) ; v1(40.284,79.858) 40.988,80.561 40.988,82.612
GPIO_ADC_NEWPRESS: PC-104.H2_17 R_voltdiv_1.2 R_voltdiv_2.2 | length 102
  Top Layer w0.33: v1(29.312,57.607) 29.362,57.556 v1(35.585,57.556) ; R_voltdiv_2.2 31.204,9.525 R_voltdiv_1.2 31.204,12.103 41.046,21.946 v1(43.891,21.946)
  Bottom Layer w0.33: v1(29.312,57.607) 29.312,77.311 33.871,81.87 33.871,87.846 32.893,88.824 PC-104.H2_17 ; v1@35.373,57.954 37.105,56.223 41.125,56.223 41.214,56.312 41.666,56.312 41.755,56.223 41.923,56.223 43.396,54.75 43.396,43.988 43.129,43.721 43.129,22.708 v1(43.891,21.946)
GPIO_ADC_OLDPRESS: PC-104.H2_19 PresAmp.6 | length 94.5
  Top Layer w0.33: PC-104.H2_19 36.691,87.414 76.389,87.414 76.452,87.351 77.724,87.351 77.953,87.122 v1@77.953,83.185 ; v1(74.727,43.485) 74.727,40.005 PresAmp.6
  Bottom Layer w0.33: v1(74.727,43.485) 75.413,44.171 77.724,44.171 78.626,45.072 78.626,54.1 77.978,54.747 78.003,54.773 v1(78.003,83.185)
NetD1_1: D1.1 Q1.1 SolenoidConnector.2 | length 36.7
  Top Layer w0.305: 20.422,43.764 20.422,48.392 D1.1
  Top Layer w0.33: 20.422,43.764 20.422,42.133 21.138,41.417 21.138,41.067 Q1.1
  Bottom Layer w0.33: SolenoidConnector.2 9.449,26.899 10.389,25.959 12.217,25.959 14.961,28.702 14.961,36.474 17.851,36.474 21.138,39.761 21.138,40.111 Q1.1
NetD2_1: D2.1 Q2.1 SolenoidConnector.4 | length 35
  Top Layer w0.305: D2.1@22.474,44.226 v1(24.968,41.732)
  Top Layer w0.33: v1(6.071,36.093) 6.071,33.934 v1(7.544,32.461) ; v1(13.919,38.329) 19.68,38.329 21.138,36.871 21.138,36.521 Q2.1
  Bottom Layer w0.33: v1(6.071,36.093) 8.306,38.329 v1(13.919,38.329) ; v1(7.544,32.461) 8.033,32.461 SolenoidConnector.4 ; Q2.1 24.968,39.395 v1(24.968,41.732)
NetD3_1: D3.1 Q3.1 SolenoidConnector.6 | length 43.3
  Top Layer w0.33: SolenoidConnector.6 9.449,32.501 8.42,31.472 8.42,25.862 9.415,24.867 v1(9.931,24.867) ; v1(30.937,20.752) D3.1
  Bottom Layer w0.33: v1(9.931,24.867) 15.311,24.867 21.188,30.744 21.188,31.094 Q3.1 21.692,31.547 24.232,31.547 25.857,29.921 25.857,24.587 27.102,24.587 v1(30.937,20.752)
NetD4_1: D4.1 Q4.1 SolenoidConnector.8 | length 45.7
  Top Layer w0.33: Q4.1 25.222,27 29.561,22.662 D4.1@29.561,16.104
  Bottom Layer w0.33: SolenoidConnector.8 8.375,35.045 6.274,32.944 6.274,28.002 6.285,27.991 6.285,27.023 6.532,27.023 7.061,26.494 7.061,26.246 9.609,23.698 20.498,23.698 21.666,24.867 Q4.1
NetDocking_0: Docking.A1 PC-104.H1_20 | length 38.9
  Top Layer w0.33: Docking.A1 3.124,80.493 10.173,87.541 33.261,87.541 33.998,86.805 33.998,86.284 PC-104.H1_20
NetDocking_1: Docking.A2 PC-104.H1_24 | length 48.4
  Top Layer w0.33: Docking.A2 3.124,76.751 3.922,76.751 4.343,77.172 4.343,80.569 5.664,81.89 v1(6.909,81.89) ; v1(12.065,80.696) 12.065,80.62 13.043,79.642 15.372,79.642 15.461,79.731 38.151,79.731 v1(38.202,79.68)
  Bottom Layer w0.305: 38.548,82.711 39.065,83.228 39.065,84.259 39.04,84.285 39.04,84.963 PC-104.H1_24
  Bottom Layer w0.33: v1(6.909,81.89) 6.909,81.432 7.569,80.772 7.633,80.772 7.837,80.569 7.964,80.696 v1(12.065,80.696) ; v1(38.202,79.68) 38.548,80.026 38.548,82.711
NetDocking_15: Docking.A16 PC-104.H1_25 | length 39.8
  Top Layer w0.33: Docking.A16 10.17,78.816 10.35,78.636 10.35,78.608 10.968,77.991 11.841,77.991 12.527,78.676 37.068,78.676 37.576,78.168 40.437,78.168 ; 40.437,78.181 v1(41.808,79.553)
  Bottom Layer w0.305: PC-104.H1_25@42.738,83.581 PC-104.H1_25 42.901,80.645
  Bottom Layer w0.33: v1(41.808,79.553) 42.901,80.645
NetDocking_16: Docking.A17 PC-104.H1_27 | length 42.7
  Top Layer w0.33: Docking.A17 9.105,76.751 9.622,76.751 10.592,77.72 10.779,77.533 12.031,77.533 12.716,78.219 36.878,78.219 37.386,77.711 43.167,77.711 v1(45.314,79.858)
  Bottom Layer w0.33: v1(45.314,79.858) 45.314,79.883 45.441,79.756 PC-104.H1_27
NetDocking_22: Docking.A23 PC-104.H1_41 | length 67.2
  Top Layer w0.305: 61.366,81.89 PC-104.H1_41
  Top Layer w0.33: Docking.A23 7.762,70.47 7.29,70.942 7.29,78.257 10.922,81.89 61.366,81.89
NetDocking_23: Docking.A24 PC-104.H1_43 | length 73.8
  Top Layer w0.305: 13.005,85.014 64.491,85.014 PC-104.H1_43
  Top Layer w0.33: Docking.A24 7.51,69.47 6.706,70.274 6.706,78.715 11.189,83.198 11.164,83.223 11.164,84.265 11.9,85.001 12.941,85.001 12.967,84.976 13.005,85.014
NetFlightSwitch_2: FlightSwitch.2 Microswitch.2 | length 57.3
  Bottom Layer w0.33: Microswitch.2 67.793,16.791 67.793,37.287 72.111,41.605 79.129,41.605 79.446,41.923 79.572,41.923 81.699,44.05 81.699,44.175 86.03,48.506 86.03,54.432 85.187,55.275 FlightSwitch.2
NetFrameGND_1: RFrame.2 | length 5.6
  Top Layer w0.33: 3.526,5.479 RFrame.2@9.169,5.479
NetIOconn_rev2_1: IOconn_rev2.1 PC-104.H1_15 | length 90.7
  Top Layer w0.305: v1(27.762,51.486) 27.915,51.486 31.039,48.362 36.703,48.362 v1(36.754,48.412)
  Top Layer w0.33: v1(41.707,10.973) 41.707,7.569 IOconn_rev2.1
  Bottom Layer w0.305: 27.762,81.259 30.201,83.698 PC-104.H1_15
  Bottom Layer w0.33: v1(27.762,51.486) 27.762,51.714 23.571,55.905 23.571,64.389 26.543,67.361 26.543,78.839 27.394,79.69 27.394,80.891 27.762,81.259 ; v1(36.754,48.412) 36.754,45.575 37.466,44.863 37.466,42.145 40.311,39.3 40.311,12.368 v1(41.707,10.973)
NetIOconn_rev2_2: IOconn_rev2.2 PC-104.H1_13 | length 94.7
  Top Layer w0.305: v1(25.425,51.587) 29.642,47.371 37.185,47.371 37.403,47.588 39.625,47.588 40.096,47.117 v1(40.97,47.117)
  Top Layer w0.33: v1(43.028,12.268) 43.49,11.806 IOconn_rev2.2
  Bottom Layer w0.33: v1(25.425,51.587) 22.022,54.991 22.022,65.049 25.629,68.656 25.629,79.218 26.225,79.815 26.225,81.403 27.661,82.838 PC-104.H1_13 ; v1@40.932,47.155 v1(40.97,47.117) 40.97,14.326 v1(43.028,12.268)
NetOpAmp_2: OpAmp.2 Q5.1 R15.2 | length 23.9
  Top Layer w0.33: OpAmp.2 76.497,27.897 77.09,27.897 82.508,22.479 ; R15.2 79.07,15.74 80.266,16.935 80.266,20.236 82.508,22.479 ; Q5.1 86.111,24.211 86.111,23.237 85.352,22.479 82.508,22.479
NetOpAmp_3: OpAmp.3 R11.1 R12.2 | length 11.2
  Top Layer w0.33: OpAmp.3 76.107,27.203 78.969,24.342 R11.1 78.969,17.577 R12.2
NetOpAmp_6: OpAmp.6 Q5.2 | length 5.6
  Top Layer w0.33: OpAmp.6 82.55,27.203 83.773,25.981 84.841,25.981 84.841,24.913 Q5.2
NetPC-104_H1_39: PC-104.H1_39
NetPC-104_H1_48: PC-104.H1_48
NetPC-104_H1_50: PC-104.H1_50
NetPC-104_H1_51: PC-104.H1_51
NetPC-104_H1_52: PC-104.H1_52
NetPresAmp_1: PresAmp.1 RPOT.2 | length 14.8
  Top Layer w0.33: RPOT.2 72.034,22.003 73.054,23.022 73.054,24.463 72.466,25.051 72.466,31.072 72.25,31.288 72.25,32.161 72.466,32.377 72.466,34.493 PresAmp.1
NetPresAmp_2: pad.6 PresAmp.2 PressureCon.4 | length 19.5
  Top Layer w0.33: v1(73.304,31.725) 73.304,33.253 73.419,33.367 73.419,34.176 PresAmp.2
  Bottom Layer w0.33: v1(73.304,31.725) 79.445,31.725 82.048,34.328 82.837,34.328 PressureCon.4 82.837,35.189 82.294,35.189 81.204,36.28 81.204,38.481 pad.6
NetPresAmp_3: pad.4 PresAmp.3 PressureCon.1 | length 27.3
  Top Layer w0.33: PresAmp.3 74.689,34.176 74.689,31.275 74.016,30.602 74.016,25.248 v1(75.489,23.774) 75.489,22.174 pad.4
  Bottom Layer w0.33: v1(75.489,23.774) 79.629,27.915 79.629,30.429 80.162,30.963 83.221,30.963 PressureCon.1
NetPresAmp_8: PresAmp.8 RPOT.3 | length 18.2
  Top Layer w0.33: RPOT.3 72.034,24.656 69.723,26.968 69.723,36.474 PresAmp.8
NetPressCon_2_2: PressCon_2.2 R_voltdiv_2.1 | length 1.5
  Top Layer w0.33: PressCon_2.2 R_voltdiv_2.1@31.237,8.636
NetPressureCon_3: pad.5 PressureCon.3 Q5.3 | length 18.8
  Top Layer w0.33: pad.5 79.781,36.452 82.294,33.939 82.837,33.939 PressureCon.3
  Bottom Layer w0.33: PressureCon.3 83.698,33.078 84.487,33.078 84.487,30.435 83.922,29.87 Q5.3
NetQ1_2: Q1.2 R1.2 | length 6.4
  Top Layer w0.305: 22.155,38.303 R1.2@25.527,38.303
  Top Layer w0.33: Q1.2 20.696,40.238 20.696,39.709 22.102,38.303 22.155,38.303
NetQ2_2: Q2.2 R2.2 | length 4.9
  Top Layer w0.305: Q2.2 20.345,35.567 20.709,35.203 20.709,35.167 21.24,34.636 21.276,34.636 22.028,33.884 R2.2@24.003,33.884
NetQ3_2: Q3.2 R3.2 | length 4.9
  Top Layer w0.305: 22.13,29.362 R3.2
  Top Layer w0.33: Q3.2 20.396,31.042 22.076,29.362 22.13,29.362
NetQ4_2: Q4.2 R4.2 | length 4.2
  Top Layer w0.305: 22.181,24.74 R4.2@23.305,24.74
  Top Layer w0.33: Q4.2 20.396,26.47 22.127,24.74 22.181,24.74
PWR_EN: PC-104.H1_30
PWR_EN_J2: XACT.A16
SPI_MISO: Docking.A19 PC-104.H1_9 XACT.A21 | length 96.9
  Top Layer w0.33: Docking.A19 8.961,74.333 22.187,74.333 v1(22.428,74.574) ; v1(22.581,76.86) 23.165,76.86 26.467,73.558 36.115,73.558 36.763,74.206 38.015,74.206 39.424,72.796 70.409,72.796 80.289,82.677 86.157,82.677 87.031,81.803 XACT.A21
  Bottom Layer w0.33: v1(22.428,74.574) 22.581,74.727 PC-104.H1_9
SPI_MOSI: Docking.A20 PC-104.H1_11 XACT.A6 | length 85
  Top Layer w0.33: Docking.A20 v1(24.372,73.47) 25.909,71.933 33.533,71.933 33.99,71.476 37.53,71.476 37.58,71.425 78.112,71.425 80.273,73.586 80.923,73.586 XACT.A6
  Bottom Layer w0.33: v1(24.372,73.47) 25.121,74.219 PC-104.H1_11
SPI_SCK: Docking.A21 PC-104.H1_7 XACT.A5 | length 89.4
  Top Layer w0.33: Docking.A21 9.105,72.189 9.622,72.189 9.675,72.136 16.213,72.136 16.429,72.352 17.302,72.352 17.518,72.136 v1(19.558,72.136) 20.32,71.374 33.299,71.374 33.96,70.714 36.886,70.714 v1@37.389,70.211 ; v1@37.363,72.72 38.202,71.882 77.881,71.882 80.586,74.586 80.923,74.586 XACT.A5
  Bottom Layer w0.33: v1(19.558,72.136) 20.041,72.619 PC-104.H1_7 ; v1(37.389,70.358) v1(37.389,72.695)
SPI_SS: Docking.A22 PC-104.H1_5 XACT.A22 | length 99.5
  Top Layer w0.33: Docking.A22 8.996,71.298 v1(16.866,71.298) ; v1(17.475,75.514) 21.877,75.514 21.992,75.628 22.865,75.628 22.979,75.514 23.818,75.514 26.231,73.101 36.304,73.101 36.952,73.749 37.825,73.749 39.235,72.339 71.12,72.339 81.001,82.22 84.049,82.22 85.827,80.442 85.827,78.861 86.286,78.402 86.623,78.402 XACT.A22
  Bottom Layer w0.33: v1(16.866,71.298) 17.501,71.933 17.475,71.958 v1(17.475,75.514) 17.475,75.336 17.501,75.311 PC-104.H1_5
UART5_RX: PC-104.H1_17 PIKSI_UARTA.1 | length 51.8
  Top Layer w0.305: PIKSI_UARTA.1 8.529,52.605 11.703,55.778 v1@27.457,55.778
  Bottom Layer w0.33: v1(27.28,55.931) 27.457,56.109 27.457,78.461 PC-104.H1_17
UART5_TX: PC-104.H1_19 PIKSI_UARTA.2 | length 55.3
  Top Layer w0.305: PIKSI_UARTA.2@7.042,51.355 8.07,51.355 11.249,54.534 v1@29.185,54.534
  Bottom Layer w0.305: v1(29.134,54.534) 30.378,55.778 30.378,60.737 30.328,60.787 30.328,77.699 35.281,82.652 PC-104.H1_19
V_BAT_1: DCDCPowerConn.3 JUMP5.1 PC-104.H2_45 PC-104.H2_46 | length 162.5
  Top Layer w0.508: DCDCPowerConn.3 30.059,12.05 48.514,30.505 48.514,39.319 45.999,41.834 45.999,60.173 44.501,61.671 v1(32.461,61.671)
  Top Layer w0.559: JUMP5.1 v1(32.461,61.671) ; v1(32.614,75.108) 44.094,75.108 47.574,78.588 v1(66.98,78.588)
  Bottom Layer w0.33: 66.98,82.842 66.878,82.944 67.018,83.084 67.018,87.541 PC-104.H2_45 PC-104.H2_46
  Bottom Layer w0.559: v1(32.461,61.671) 32.461,75.159 32.512,75.108 v1(32.614,75.108) ; v1(66.98,78.588) 66.98,82.842
V_BAT_1_JUMP5: Docking.A14 Docking.A15 JUMP5.2 pad.2 | length 15.9
  Top Layer w0.508: Docking.A14 3.124,62.915 v1(4.064,61.976)
  Bottom Layer w0.33: JUMP5.2 pad.2
  Bottom Layer w0.559: v1@4.368,61.671 JUMP5.2
pads on no net: Docking.A25 Docking.A26 Docking.A27 Docking.A28 Docking.A29 Docking.A30 Docking.B1 Docking.B2 Docking.B3 Docking.B4 Docking.B5 Docking.B6 Docking.B7 Docking.B8 Docking.B9 Docking.B10 Docking.B11 Docking.B12 Docking.B13 Docking.B14 Docking.B15 Docking.B16 Docking.B17 Docking.B18 Docking.B19 Docking.B20 Docking.B21 Docking.B22 Docking.B23 Docking.B24 Docking.B25 Docking.B26 Docking.B27 Docking.B28 Docking.B29 Docking.B30 IOconn_rev2.5 IOconn_rev2.6 Microswitch.1 OpAmp.1 OpAmp.5 OpAmp.7 OpAmp.8 PC-104.H1_1 PC-104.H1_2 PC-104.H1_3 PC-104.H1_4 PC-104.H1_6 PC-104.H1_8 PC-104.H1_10 PC-104.H1_12 PC-104.H1_14 PC-104.H1_16 PC-104.H1_18 PC-104.H1_21 PC-104.H1_22 PC-104.H1_23 PC-104.H1_28 PC-104.H1_29 PC-104.H1_31 PC-104.H1_33 PC-104.H1_34 PC-104.H1_35 PC-104.H1_36 PC-104.H1_37 PC-104.H1_38 PC-104.H1_40 PC-104.H1_42 PC-104.H1_44 PC-104.H1_45 PC-104.H1_46 PC-104.H2_1 PC-104.H2_2 PC-104.H2_3 PC-104.H2_4 PC-104.H2_5 PC-104.H2_6 PC-104.H2_7 PC-104.H2_8 PC-104.H2_9 PC-104.H2_10 PC-104.H2_11 PC-104.H2_12 PC-104.H2_18 PC-104.H2_20 PC-104.H2_21 PC-104.H2_22 PC-104.H2_23 PC-104.H2_24 PC-104.H2_30 PC-104.H2_32 PC-104.H2_33 PC-104.H2_34 PC-104.H2_35 PC-104.H2_36 PC-104.H2_37 PC-104.H2_38 PC-104.H2_39 PC-104.H2_40 PC-104.H2_41 PC-104.H2_42 PC-104.H2_43 PC-104.H2_44 PC-104.H2_47 PC-104.H2_48 PC-104.H2_49 PC-104.H2_50 PC-104.H2_51 PC-104.H2_52 PIKSI_UARTA.3 PIKSI_UARTA.5 PIKSI_UARTA.6 PressCon_2.3 PressCon_2.5 PressCon_2.6 PressureCon.5 PressureCon.6 RPOT.1 SolenoidConnector.9 SolenoidConnector.10 SolenoidConnector.W1 SolenoidConnector.W2 SolenoidConnector.W3 SolenoidConnector.W4 XACT.A1 XACT.A2 XACT.A3 XACT.A7 XACT.A8 XACT.A11 XACT.A12 XACT.A13 XACT.A17 XACT.A18 XACT.A19 XACT.A23 XACT.A24 XACT.A27 XACT.A28 XACT.A29 XACT.A32 XACT.A33 XACT.A34 XACT.A35 XACT.A36 XACT.A37 XACT.A38 XACT.A39 XACT.A40 XACT.B1 XACT.B2 XACT.B3 XACT.B4 XACT.B5 XACT.B6 XACT.B7 XACT.B8 XACT.B9 XACT.B10 XACT.B11 XACT.B12 XACT.B13 XACT.B14 XACT.B15 XACT.B16 XACT.B17 XACT.B18 XACT.B19 XACT.B20 XACT.B21 XACT.B22 XACT.B23 XACT.B24 XACT.B25 XACT.B26 XACT.B27 XACT.B28 XACT.B29 XACT.B30 XACT.B31 XACT.B32 XACT.B33 XACT.B34 XACT.B35 XACT.B36 XACT.B37 XACT.B38 XACT.B39 XACT.B40
copper on no net:
  other v2: 3.526,5.479 83.526,5.479 7.326,91.179 81.026,91.179
  other v4: 8.651,15.55

## Polygon pours and split planes (outlines as drawn)
ANALOGGND on GndPlane (split plane): 88.72,11.001 88.592,10.874 73.891,10.874 67.185,17.58 67.185,37.589 71.377,41.781 88.72,41.781
GOM_GND_1 on GndPlane (split plane): 88.567,91.209 88.567,42.878 88.389,42.7 70.409,42.7 70.359,42.69 70.317,42.662 65.644,37.988 65.616,37.946 65.606,37.897 65.606,17.297 65.616,17.248 65.644,17.206 73.289,9.56 73.331,9.532 73.357,9.527 73.363,9.501 73.391,9.459 73.433,9.431 73.482,9.421 88.085,9.421 88.085,5.87 84.706,2.492 5.261,2.492 1.704,6.048 1.704,89.583 5.032,92.911 86.865,92.911
no net on GndPlane (split plane): 89.279,91.991 89.279,91.821 89.279,5.469 85.488,1.679 3.945,1.679 1.196,4.428 1.196,89.755 4.987,93.546 87.723,93.546
+12V_1_JUMP7 on PowerPlane (split plane): 89.279,91.991 89.279,91.821 89.279,5.469 85.488,1.679 3.945,1.679 1.196,4.428 1.196,89.755 4.987,93.546 87.723,93.546

## Other copper
GndPlane (plane layer: these items are gaps in the copper):
  lines w0.254: 73.381,9.652 65.735,17.297 65.735,37.897 70.409,42.57 88.443,42.57 88.697,42.824 88.697,91.262 86.919,93.04 4.978,93.04 1.575,89.637 1.575,5.994 5.207,2.362 84.76,2.362 88.214,5.817 88.214,9.55 73.482,9.55 ; 67.056,17.526 67.056,37.643 71.323,41.91 88.849,41.91 88.849,10.947 88.646,10.744 73.838,10.744 67.056,17.526

## Silkscreen, mask and mechanical layers (free items; w line width, h text height)
Top Overlay:
  rectangle: 58.344,59.893 63.221,64.338
  text "GOM_GND_1" at 72.898,73.05 h0.38
  text "GOM_GND_1" at 4.166,71.73 h0.38
  text "Cornell  / Umbilical Board  / Rev 3" at 57.76,65.659 h1
  text "V_BAT_1_JUMP5" at 16.434,64.11 h0.38
  text "V_BAT_1" at 31.979,60.401 h0.38
  text "+12V_1" at 1.549,58.42 h0.38
  text "GOM_GND_1" at 8.992,56.769 h0.51
  text "+5V_3_Jump3" at 31.801,53.569 h0.51
  text "GOM_GND_1" at 52.121,53.315 h0.8
  text "+12Volts" at 64.516,53.111 h0.8
  text "GOM_GND_1" at 31.14,44.12 h0.51
  text "ANALOG_GND" at 56.109,43.51 h0.64
  text "+EX" at 78.156,41.072 h0.51
  text "C3" at 46.38,40.208 h0.64
  text "-OUT" at 80.772,39.573 h0.51
  text "C2" at 46.66,38.735 h0.64
  text "3V3_2" at 61.29,34.874 h0.64
  text "S4" at 12.852,34.747 h0.64
  text "C4" at 46.888,34.366 h0.64
  text "S3" at 12.827,32.639 h0.64
  text "C1" at 47.193,32.08 h0.64
  text "S2" at 12.903,30.607 h0.64
  text "S1" at 12.954,28.651 h0.64
  text "+Out" at 75.616,19.99 h0.51
Mechanical 2:
  lines w0.762: 0.305,4.216 ccw(c0.686,4.216) 0.416,3.947 ; 0.305,4.216 ccw(c0.686,4.216) 0.417,3.947 ; 0.305,4.216 0.305,89.967 ; 0.305,89.967 cw(c0.686,89.967) 0.417,90.237 ; 0.305,89.967 cw(c0.686,89.967) 0.416,90.236 0.417,90.237 ; 0.416,3.947 0.417,3.947 ; 0.417,3.947 3.439,0.925 ; 0.417,90.237 4.505,94.325 ; 3.439,0.924 ccw(c3.708,1.194) 3.439,0.924 ; 3.439,0.925 ccw(c3.708,1.194) 3.439,0.924 ; 3.439,0.925 3.439,0.924 ; 3.439,0.924 3.439,0.924 ; 3.439,0.924 3.464,0.899 ; 3.464,0.899 ccw(c3.734,1.168) 3.734,0.787 ; 3.464,0.899 ccw(c3.734,1.168) 3.734,0.787 ; 3.464,0.899 3.464,0.899 ; 3.734,0.787 84.506,0.787 85.7,0.787 ; 4.506,94.326 cw(c4.775,94.056) 4.775,94.437 ; 4.505,94.325 cw(c4.775,94.056) 4.775,94.437 ; 4.505,94.325 4.506,94.326 ; 4.775,94.437 4.801,94.437 87.694,94.437 ; 85.7,0.787 ccw(c85.7,1.168) 85.969,0.899 85.969,0.899 ; 85.7,0.787 ccw(c85.7,1.168) 85.969,0.899 ; 85.969,0.899 90.058,4.988 ; 87.694,94.437 cw(c87.884,94.107) 88.154,94.376 ; 87.694,94.437 cw(c87.884,94.107) 88.153,94.376 88.154,94.376 ; 88.154,94.376 90.058,92.472 ; 90.058,4.988 ccw(c89.789,5.258) 90.17,5.258 ; 90.058,4.988 ccw(c89.789,5.258) 90.17,5.258 ; 90.058,4.988 90.058,4.988 ; 90.058,92.472 cw(c89.789,92.202) 90.17,92.202 ; 90.058,92.472 90.058,92.471 cw(c89.789,92.202) 90.17,92.202 ; 90.17,5.258 90.17,91.821 90.17,92.202
Drill Drawing:
  text ".Legend" at 67.386,-4.216 h1.52

## Dimensions
0.417,90.237 to 90.17,92.202 on Dimensions

## Text inside footprints (layer, text, board x,y; h text height)
B1: Top Overlay "+" at 51.403,15.457 h1.52; Top Overlay "-" at 62.128,12.407 h1.52; Top Overlay "-" at 51.553,9.232 h1.52
PC-104: Mechanical 1 "J1" at 51.827,87.638 h0.76
PresAmp: Top Overlay "*" at 71.018,34.493 h1.27 r90; Dimensions "*" at 71.018,34.493 h1.27 r90
SolenoidConnector: Mechanical 1 "J1" at 5.639,32.548 h0.76 r90